# EAGLE board untitled (EAGLE 9.6.2), part 1 of 9
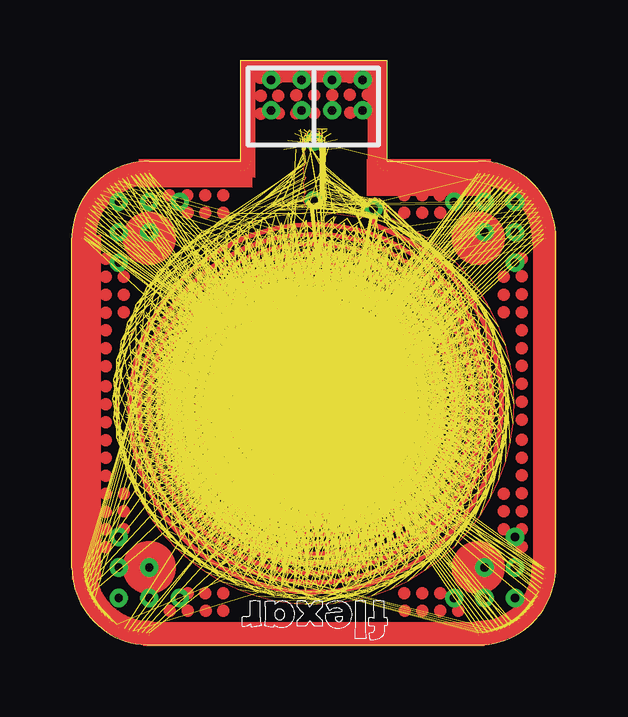
[diagram p0: board, top side]
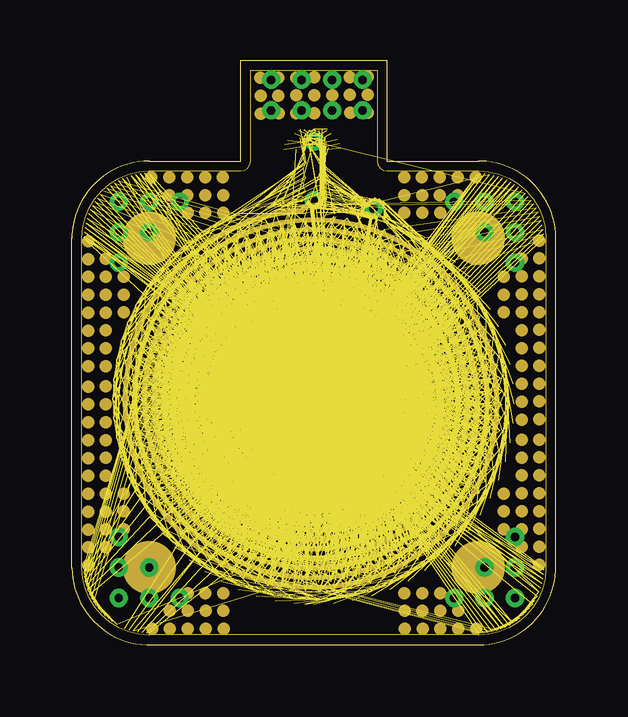
[diagram p1: board, inner layer Route2]
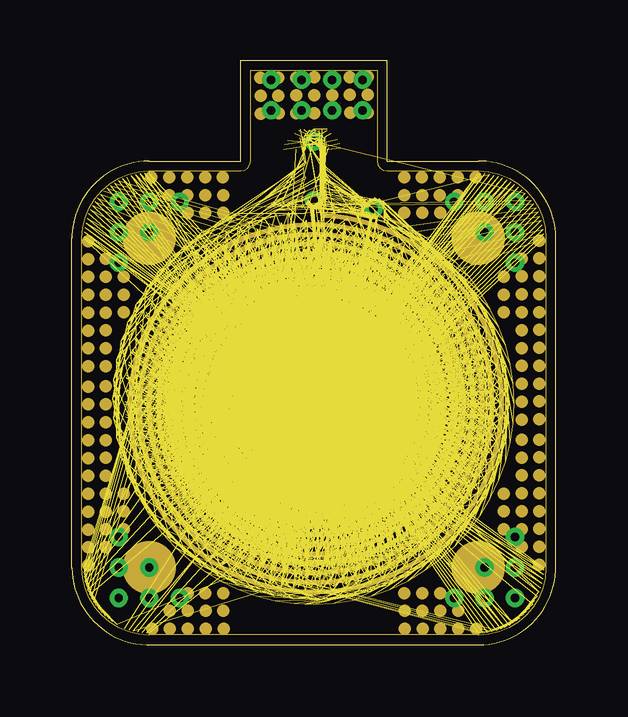
[diagram p2: board, inner layer Route3]
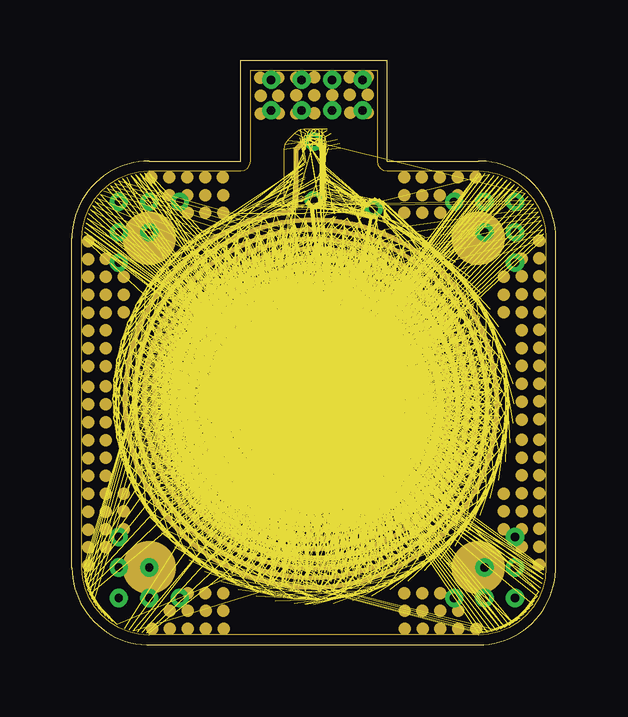
[diagram p3: board, inner layer Route14]
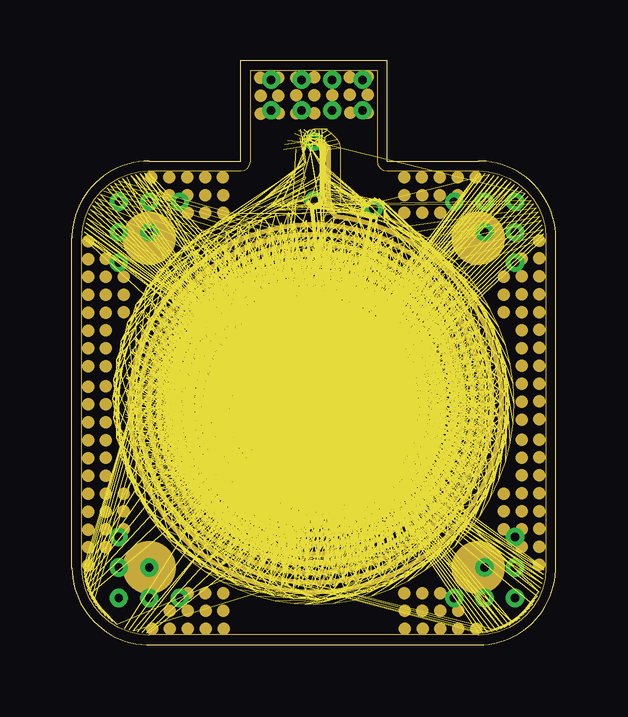
[diagram p4: board, inner layer Route15]
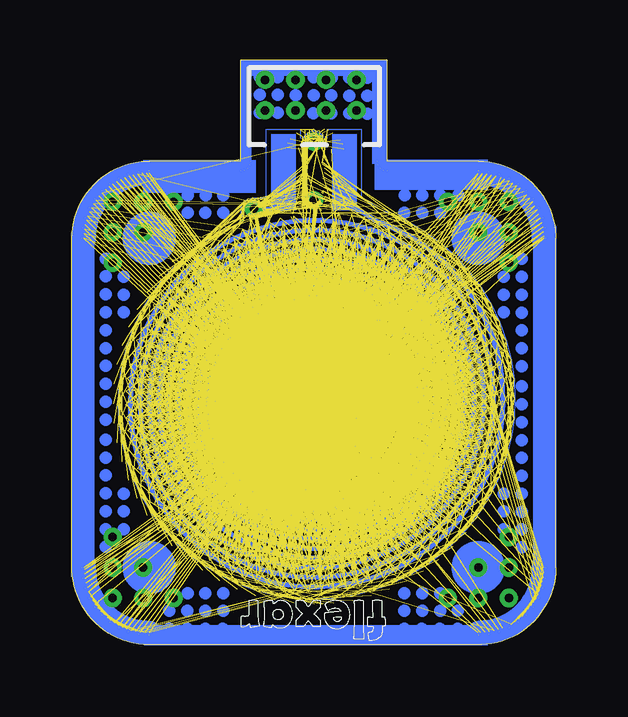
[diagram p5: board, bottom side, seen from below]

Size 20.16 x 24.36 mm. Coordinates in mm from the lower left corner, seen from the top.
Outline: 0,3.22 0.01,3 0.03,2.77 0.07,2.55 0.12,2.34 0.19,2.12 0.28,1.91 0.38,1.71 0.49,1.52 0.62,1.33 0.75,1.15 0.9,0.98 1.07,0.83 1.24,0.68 1.42,0.55 1.61,0.43 1.81,0.33 2.02,0.23 2.23,0.16 2.44,0.1 2.66,0.05 2.89,0.02 3.11,0 3.22,0 16.94,0 17.16,0.01 17.39,0.03 17.61,0.07 17.82,0.12 18.04,0.19 18.25,0.28 18.45,0.38 18.64,0.49 18.83,0.62 19.01,0.75 19.18,0.9 19.33,1.07 19.48,1.24 19.61,1.42 19.73,1.61 19.83,1.81 19.93,2.02 20,2.23 20.06,2.44 20.11,2.66 20.14,2.89 20.16,3.11 20.16,3.22 20.16,16.94 20.15,17.16 20.13,17.39 20.09,17.61 20.04,17.82 19.97,18.04 19.88,18.25 19.78,18.45 19.67,18.64 19.54,18.83 19.41,19.01 19.26,19.18 19.09,19.33 18.92,19.48 18.74,19.61 18.55,19.73 18.35,19.83 18.14,19.93 17.93,20 17.72,20.06 17.5,20.11 17.27,20.14 17.05,20.16 16.94,20.16 13.13,20.16 13.13,24.36 7.03,24.36 7.03,20.16 3.22,20.16 3,20.15 2.77,20.13 2.55,20.09 2.34,20.04 2.12,19.97 1.91,19.88 1.71,19.78 1.52,19.67 1.33,19.54 1.15,19.41 0.98,19.26 0.83,19.09 0.68,18.92 0.55,18.74 0.43,18.55 0.33,18.35 0.23,18.14 0.16,17.93 0.1,17.72 0.05,17.5 0.02,17.27 0,17.05 0,16.94 0,3.22
Copper layers (1+2*3+14*15+16): Top 0.035mm / dielectric 1.5mm / Route2 0.035mm / dielectric 0.15mm / Route3 0.035mm / dielectric 0.2mm / Route14 0.035mm / dielectric 0.15mm / Route15 0.035mm / dielectric 0.2mm / Bottom 0.035mm
Design rules "default *": minimum track width 6mil, minimum drill 0.35mm, track to track 6mil, track to pad 6mil, pad to pad 6mil, via to via 6mil, smd to smd 6mil, copper to edge 40mil, drill to drill 6mil, minimum pad ring 10mil, minimum via ring 8mil, stop-mask expansion 4mil, vias tented up to drill 0mil, thermal gap 10mil

## Placement (x,y rotation side)

## Tracks (layer width: path | path; a pad name or v marks a point on that pad's centre or on a via)
S$1  (5 unrouted)
  Top 0: 12.72,20.16 12.75,20
  Route2 0: 12.72,20.16 12.75,20
  Route3 0: 12.72,20.16 12.75,20
  Route14 0: 12.72,20.16 12.75,20
  Route15 0: 12.72,20.16 12.75,20
  Bottom 0: 12.72,20.16 12.75,20
S$2  (5 unrouted)
  Top 0: 12.75,20 12.84,19.87
  Route2 0: 12.75,20 12.84,19.87
  Route3 0: 12.75,20 12.84,19.87
  Route14 0: 12.75,20 12.84,19.87
  Route15 0: 12.75,20 12.84,19.87
  Bottom 0: 12.75,20 12.84,19.87
S$3  (5 unrouted)
  Top 0: 12.84,19.87 12.97,19.78
  Route2 0: 12.84,19.87 12.97,19.78
  Route3 0: 12.84,19.87 12.97,19.78
  Route14 0: 12.84,19.87 12.97,19.78
  Route15 0: 12.84,19.87 12.97,19.78
  Bottom 0: 12.84,19.87 12.97,19.78
S$4  (5 unrouted)
  Top 0: 12.97,19.78 13.13,19.75
  Route2 0: 12.97,19.78 13.13,19.75
  Route3 0: 12.97,19.78 13.13,19.75
  Route14 0: 12.97,19.78 13.13,19.75
  Route15 0: 12.97,19.78 13.13,19.75
  Bottom 0: 12.97,19.78 13.13,19.75
S$5  (5 unrouted)
  Top 0: 13.13,19.75 16.94,19.75
  Route2 0: 13.13,19.75 16.94,19.75
  Route3 0: 13.13,19.75 16.94,19.75
  Route14 0: 13.13,19.75 16.94,19.75
  Route15 0: 13.13,19.75 16.94,19.75
  Bottom 0: 13.13,19.75 16.94,19.75
S$6  (5 unrouted)
  Top 0: 16.94,19.75 16.95,19.75
  Route2 0: 16.94,19.75 16.95,19.75
  Route3 0: 16.94,19.75 16.95,19.75
  Route14 0: 16.94,19.75 16.95,19.75
  Route15 0: 16.94,19.75 16.95,19.75
  Bottom 0: 16.94,19.75 16.95,19.75
S$7  (5 unrouted)
  Top 0: 16.95,19.75 17.38,19.72
  Route2 0: 16.95,19.75 17.38,19.72
  Route3 0: 16.95,19.75 17.38,19.72
  Route14 0: 16.95,19.75 17.38,19.72
  Route15 0: 16.95,19.75 17.38,19.72
  Bottom 0: 16.95,19.75 17.38,19.72
S$8  (5 unrouted)
  Top 0: 17.38,19.72 17.81,19.61
  Route2 0: 17.38,19.72 17.81,19.61
  Route3 0: 17.38,19.72 17.81,19.61
  Route14 0: 17.38,19.72 17.81,19.61
  Route15 0: 17.38,19.72 17.81,19.61
  Bottom 0: 17.38,19.72 17.81,19.61
S$9  (5 unrouted)
  Top 0: 17.81,19.61 18.21,19.44
  Route2 0: 17.81,19.61 18.21,19.44
  Route3 0: 17.81,19.61 18.21,19.44
  Route14 0: 17.81,19.61 18.21,19.44
  Route15 0: 17.81,19.61 18.21,19.44
  Bottom 0: 17.81,19.61 18.21,19.44
S$10  (5 unrouted)
  Top 0: 18.21,19.44 18.59,19.21
  Route2 0: 18.21,19.44 18.59,19.21
  Route3 0: 18.21,19.44 18.59,19.21
  Route14 0: 18.21,19.44 18.59,19.21
  Route15 0: 18.21,19.44 18.59,19.21
  Bottom 0: 18.21,19.44 18.59,19.21
S$11  (5 unrouted)
  Top 0: 18.59,19.21 18.93,18.93
  Route2 0: 18.59,19.21 18.93,18.93
  Route3 0: 18.59,19.21 18.93,18.93
  Route14 0: 18.59,19.21 18.93,18.93
  Route15 0: 18.59,19.21 18.93,18.93
  Bottom 0: 18.59,19.21 18.93,18.93
S$12  (5 unrouted)
  Top 0: 18.93,18.93 19.21,18.59
  Route2 0: 18.93,18.93 19.21,18.59
  Route3 0: 18.93,18.93 19.21,18.59
  Route14 0: 18.93,18.93 19.21,18.59
  Route15 0: 18.93,18.93 19.21,18.59
  Bottom 0: 18.93,18.93 19.21,18.59
S$13  (5 unrouted)
  Top 0: 19.21,18.59 19.44,18.21
  Route2 0: 19.21,18.59 19.44,18.21
  Route3 0: 19.21,18.59 19.44,18.21
  Route14 0: 19.21,18.59 19.44,18.21
  Route15 0: 19.21,18.59 19.44,18.21
  Bottom 0: 19.21,18.59 19.44,18.21
S$14  (5 unrouted)
  Top 0: 19.44,18.21 19.61,17.81
  Route2 0: 19.44,18.21 19.61,17.81
  Route3 0: 19.44,18.21 19.61,17.81
  Route14 0: 19.44,18.21 19.61,17.81
  Route15 0: 19.44,18.21 19.61,17.81
  Bottom 0: 19.44,18.21 19.61,17.81
S$15  (5 unrouted)
  Top 0: 19.61,17.81 19.72,17.38
  Route2 0: 19.61,17.81 19.72,17.38
  Route3 0: 19.61,17.81 19.72,17.38
  Route14 0: 19.61,17.81 19.72,17.38
  Route15 0: 19.61,17.81 19.72,17.38
  Bottom 0: 19.61,17.81 19.72,17.38
S$16  (5 unrouted)
  Top 0: 19.72,17.38 19.75,16.95
  Route2 0: 19.72,17.38 19.75,16.95
  Route3 0: 19.72,17.38 19.75,16.95
  Route14 0: 19.72,17.38 19.75,16.95
  Route15 0: 19.72,17.38 19.75,16.95
  Bottom 0: 19.72,17.38 19.75,16.95
S$17  (5 unrouted)
  Top 0: 19.75,16.95 19.75,16.94
  Route2 0: 19.75,16.95 19.75,16.94
  Route3 0: 19.75,16.95 19.75,16.94
  Route14 0: 19.75,16.95 19.75,16.94
  Route15 0: 19.75,16.95 19.75,16.94
  Bottom 0: 19.75,16.95 19.75,16.94
S$18  (5 unrouted)
  Top 0: 19.75,16.94 19.75,3.22
  Route2 0: 19.75,16.94 19.75,3.22
  Route3 0: 19.75,16.94 19.75,3.22
  Route14 0: 19.75,16.94 19.75,3.22
  Route15 0: 19.75,16.94 19.75,3.22
  Bottom 0: 19.75,16.94 19.75,3.22
S$19  (5 unrouted)
  Top 0: 19.75,3.22 19.75,3.21
  Route2 0: 19.75,3.22 19.75,3.21
  Route3 0: 19.75,3.22 19.75,3.21
  Route14 0: 19.75,3.22 19.75,3.21
  Route15 0: 19.75,3.22 19.75,3.21
  Bottom 0: 19.75,3.22 19.75,3.21
S$20  (5 unrouted)
  Top 0: 19.75,3.21 19.72,2.78
  Route2 0: 19.75,3.21 19.72,2.78
  Route3 0: 19.75,3.21 19.72,2.78
  Route14 0: 19.75,3.21 19.72,2.78
  Route15 0: 19.75,3.21 19.72,2.78
  Bottom 0: 19.75,3.21 19.72,2.78
S$21  (5 unrouted)
  Top 0: 19.72,2.78 19.61,2.35
  Route2 0: 19.72,2.78 19.61,2.35
  Route3 0: 19.72,2.78 19.61,2.35
  Route14 0: 19.72,2.78 19.61,2.35
  Route15 0: 19.72,2.78 19.61,2.35
  Bottom 0: 19.72,2.78 19.61,2.35
S$22  (5 unrouted)
  Top 0: 19.61,2.35 19.44,1.95
  Route2 0: 19.61,2.35 19.44,1.95
  Route3 0: 19.61,2.35 19.44,1.95
  Route14 0: 19.61,2.35 19.44,1.95
  Route15 0: 19.61,2.35 19.44,1.95
  Bottom 0: 19.61,2.35 19.44,1.95
S$23  (5 unrouted)
  Top 0: 19.44,1.95 19.21,1.57
  Route2 0: 19.44,1.95 19.21,1.57
  Route3 0: 19.44,1.95 19.21,1.57
  Route14 0: 19.44,1.95 19.21,1.57
  Route15 0: 19.44,1.95 19.21,1.57
  Bottom 0: 19.44,1.95 19.21,1.57
S$24  (5 unrouted)
  Top 0: 19.21,1.57 18.93,1.23
  Route2 0: 19.21,1.57 18.93,1.23
  Route3 0: 19.21,1.57 18.93,1.23
  Route14 0: 19.21,1.57 18.93,1.23
  Route15 0: 19.21,1.57 18.93,1.23
  Bottom 0: 19.21,1.57 18.93,1.23
S$25  (5 unrouted)
  Top 0: 18.93,1.23 18.59,0.95
  Route2 0: 18.93,1.23 18.59,0.95
  Route3 0: 18.93,1.23 18.59,0.95
  Route14 0: 18.93,1.23 18.59,0.95
  Route15 0: 18.93,1.23 18.59,0.95
  Bottom 0: 18.93,1.23 18.59,0.95
S$26  (5 unrouted)
  Top 0: 18.59,0.95 18.21,0.72
  Route2 0: 18.59,0.95 18.21,0.72
  Route3 0: 18.59,0.95 18.21,0.72
  Route14 0: 18.59,0.95 18.21,0.72
  Route15 0: 18.59,0.95 18.21,0.72
  Bottom 0: 18.59,0.95 18.21,0.72
S$27  (5 unrouted)
  Top 0: 18.21,0.72 17.81,0.55
  Route2 0: 18.21,0.72 17.81,0.55
  Route3 0: 18.21,0.72 17.81,0.55
  Route14 0: 18.21,0.72 17.81,0.55
  Route15 0: 18.21,0.72 17.81,0.55
  Bottom 0: 18.21,0.72 17.81,0.55
S$28  (5 unrouted)
  Top 0: 17.81,0.55 17.38,0.44
  Route2 0: 17.81,0.55 17.38,0.44
  Route3 0: 17.81,0.55 17.38,0.44
  Route14 0: 17.81,0.55 17.38,0.44
  Route15 0: 17.81,0.55 17.38,0.44
  Bottom 0: 17.81,0.55 17.38,0.44
S$29  (5 unrouted)
  Top 0: 17.38,0.44 16.95,0.41
  Route2 0: 17.38,0.44 16.95,0.41
  Route3 0: 17.38,0.44 16.95,0.41
  Route14 0: 17.38,0.44 16.95,0.41
  Route15 0: 17.38,0.44 16.95,0.41
  Bottom 0: 17.38,0.44 16.95,0.41
S$30  (5 unrouted)
  Top 0: 16.95,0.41 16.94,0.41
  Route2 0: 16.95,0.41 16.94,0.41
  Route3 0: 16.95,0.41 16.94,0.41
  Route14 0: 16.95,0.41 16.94,0.41
  Route15 0: 16.95,0.41 16.94,0.41
  Bottom 0: 16.95,0.41 16.94,0.41
S$31  (5 unrouted)
  Top 0: 16.94,0.41 3.22,0.41
  Route2 0: 16.94,0.41 3.22,0.41
  Route3 0: 16.94,0.41 3.22,0.41
  Route14 0: 16.94,0.41 3.22,0.41
  Route15 0: 16.94,0.41 3.22,0.41
  Bottom 0: 16.94,0.41 3.22,0.41
S$32  (5 unrouted)
  Top 0: 3.22,0.41 3.21,0.41
  Route2 0: 3.22,0.41 3.21,0.41
  Route3 0: 3.22,0.41 3.21,0.41
  Route14 0: 3.22,0.41 3.21,0.41
  Route15 0: 3.22,0.41 3.21,0.41
  Bottom 0: 3.22,0.41 3.21,0.41
S$33  (5 unrouted)
  Top 0: 3.21,0.41 2.78,0.44
  Route2 0: 3.21,0.41 2.78,0.44
  Route3 0: 3.21,0.41 2.78,0.44
  Route14 0: 3.21,0.41 2.78,0.44
  Route15 0: 3.21,0.41 2.78,0.44
  Bottom 0: 3.21,0.41 2.78,0.44
S$34  (5 unrouted)
  Top 0: 2.78,0.44 2.35,0.55
  Route2 0: 2.78,0.44 2.35,0.55
  Route3 0: 2.78,0.44 2.35,0.55
  Route14 0: 2.78,0.44 2.35,0.55
  Route15 0: 2.78,0.44 2.35,0.55
  Bottom 0: 2.78,0.44 2.35,0.55
S$35  (5 unrouted)
  Top 0: 2.35,0.55 1.95,0.72
  Route2 0: 2.35,0.55 1.95,0.72
  Route3 0: 2.35,0.55 1.95,0.72
  Route14 0: 2.35,0.55 1.95,0.72
  Route15 0: 2.35,0.55 1.95,0.72
  Bottom 0: 2.35,0.55 1.95,0.72
S$36  (5 unrouted)
  Top 0: 1.95,0.72 1.57,0.95
  Route2 0: 1.95,0.72 1.57,0.95
  Route3 0: 1.95,0.72 1.57,0.95
  Route14 0: 1.95,0.72 1.57,0.95
  Route15 0: 1.95,0.72 1.57,0.95
  Bottom 0: 1.95,0.72 1.57,0.95
S$37  (5 unrouted)
  Top 0: 1.57,0.95 1.23,1.23
  Route2 0: 1.57,0.95 1.23,1.23
  Route3 0: 1.57,0.95 1.23,1.23
  Route14 0: 1.57,0.95 1.23,1.23
  Route15 0: 1.57,0.95 1.23,1.23
  Bottom 0: 1.57,0.95 1.23,1.23
S$38  (5 unrouted)
  Top 0: 1.23,1.23 0.95,1.57
  Route2 0: 1.23,1.23 0.95,1.57
  Route3 0: 1.23,1.23 0.95,1.57
  Route14 0: 1.23,1.23 0.95,1.57
  Route15 0: 1.23,1.23 0.95,1.57
  Bottom 0: 1.23,1.23 0.95,1.57
S$39  (5 unrouted)
  Top 0: 0.95,1.57 0.72,1.95
  Route2 0: 0.95,1.57 0.72,1.95
  Route3 0: 0.95,1.57 0.72,1.95
  Route14 0: 0.95,1.57 0.72,1.95
  Route15 0: 0.95,1.57 0.72,1.95
  Bottom 0: 0.95,1.57 0.72,1.95
S$40  (5 unrouted)
  Top 0: 0.72,1.95 0.55,2.35
  Route2 0: 0.72,1.95 0.55,2.35
  Route3 0: 0.72,1.95 0.55,2.35
  Route14 0: 0.72,1.95 0.55,2.35
  Route15 0: 0.72,1.95 0.55,2.35
  Bottom 0: 0.72,1.95 0.55,2.35
S$41  (5 unrouted)
  Top 0: 0.55,2.35 0.44,2.78
  Route2 0: 0.55,2.35 0.44,2.78
  Route3 0: 0.55,2.35 0.44,2.78
  Route14 0: 0.55,2.35 0.44,2.78
  Route15 0: 0.55,2.35 0.44,2.78
  Bottom 0: 0.55,2.35 0.44,2.78
S$42  (5 unrouted)
  Top 0: 0.44,2.78 0.41,3.21
  Route2 0: 0.44,2.78 0.41,3.21
  Route3 0: 0.44,2.78 0.41,3.21
  Route14 0: 0.44,2.78 0.41,3.21
  Route15 0: 0.44,2.78 0.41,3.21
  Bottom 0: 0.44,2.78 0.41,3.21
S$43  (5 unrouted)
  Top 0: 0.41,3.21 0.41,3.22
  Route2 0: 0.41,3.21 0.41,3.22
  Route3 0: 0.41,3.21 0.41,3.22
  Route14 0: 0.41,3.21 0.41,3.22
  Route15 0: 0.41,3.21 0.41,3.22
  Bottom 0: 0.41,3.21 0.41,3.22
S$44  (5 unrouted)
  Top 0: 0.41,3.22 0.41,16.94
  Route2 0: 0.41,3.22 0.41,16.94
  Route3 0: 0.41,3.22 0.41,16.94
  Route14 0: 0.41,3.22 0.41,16.94
  Route15 0: 0.41,3.22 0.41,16.94
  Bottom 0: 0.41,3.22 0.41,16.94
S$45  (5 unrouted)
  Top 0: 0.41,16.94 0.41,16.95
  Route2 0: 0.41,16.94 0.41,16.95
  Route3 0: 0.41,16.94 0.41,16.95
  Route14 0: 0.41,16.94 0.41,16.95
  Route15 0: 0.41,16.94 0.41,16.95
  Bottom 0: 0.41,16.94 0.41,16.95
S$46  (5 unrouted)
  Top 0: 0.41,16.95 0.44,17.38
  Route2 0: 0.41,16.95 0.44,17.38
  Route3 0: 0.41,16.95 0.44,17.38
  Route14 0: 0.41,16.95 0.44,17.38
  Route15 0: 0.41,16.95 0.44,17.38
  Bottom 0: 0.41,16.95 0.44,17.38
S$47  (5 unrouted)
  Top 0: 0.44,17.38 0.55,17.81
  Route2 0: 0.44,17.38 0.55,17.81
  Route3 0: 0.44,17.38 0.55,17.81
  Route14 0: 0.44,17.38 0.55,17.81
  Route15 0: 0.44,17.38 0.55,17.81
  Bottom 0: 0.44,17.38 0.55,17.81
S$48  (5 unrouted)
  Top 0: 0.55,17.81 0.72,18.21
  Route2 0: 0.55,17.81 0.72,18.21
  Route3 0: 0.55,17.81 0.72,18.21
  Route14 0: 0.55,17.81 0.72,18.21
  Route15 0: 0.55,17.81 0.72,18.21
  Bottom 0: 0.55,17.81 0.72,18.21
S$49  (5 unrouted)
  Top 0: 0.72,18.21 0.95,18.59
  Route2 0: 0.72,18.21 0.95,18.59
  Route3 0: 0.72,18.21 0.95,18.59
  Route14 0: 0.72,18.21 0.95,18.59
  Route15 0: 0.72,18.21 0.95,18.59
  Bottom 0: 0.72,18.21 0.95,18.59
S$50  (5 unrouted)
  Top 0: 0.95,18.59 1.23,18.93
  Route2 0: 0.95,18.59 1.23,18.93
  Route3 0: 0.95,18.59 1.23,18.93
  Route14 0: 0.95,18.59 1.23,18.93
  Route15 0: 0.95,18.59 1.23,18.93
  Bottom 0: 0.95,18.59 1.23,18.93
S$51  (5 unrouted)
  Top 0: 1.23,18.93 1.57,19.21
  Route2 0: 1.23,18.93 1.57,19.21
  Route3 0: 1.23,18.93 1.57,19.21
  Route14 0: 1.23,18.93 1.57,19.21
  Route15 0: 1.23,18.93 1.57,19.21
  Bottom 0: 1.23,18.93 1.57,19.21
S$52  (5 unrouted)
  Top 0: 1.57,19.21 1.95,19.44
  Route2 0: 1.57,19.21 1.95,19.44
  Route3 0: 1.57,19.21 1.95,19.44
  Route14 0: 1.57,19.21 1.95,19.44
  Route15 0: 1.57,19.21 1.95,19.44
  Bottom 0: 1.57,19.21 1.95,19.44
S$53  (5 unrouted)
  Top 0: 1.95,19.44 2.35,19.61
  Route2 0: 1.95,19.44 2.35,19.61
  Route3 0: 1.95,19.44 2.35,19.61
  Route14 0: 1.95,19.44 2.35,19.61
  Route15 0: 1.95,19.44 2.35,19.61
  Bottom 0: 1.95,19.44 2.35,19.61
S$54  (5 unrouted)
  Top 0: 2.35,19.61 2.78,19.72
  Route2 0: 2.35,19.61 2.78,19.72
  Route3 0: 2.35,19.61 2.78,19.72
  Route14 0: 2.35,19.61 2.78,19.72
  Route15 0: 2.35,19.61 2.78,19.72
  Bottom 0: 2.35,19.61 2.78,19.72
S$55  (5 unrouted)
  Top 0: 2.78,19.72 3.21,19.75
  Route2 0: 2.78,19.72 3.21,19.75
  Route3 0: 2.78,19.72 3.21,19.75
  Route14 0: 2.78,19.72 3.21,19.75
  Route15 0: 2.78,19.72 3.21,19.75
  Bottom 0: 2.78,19.72 3.21,19.75
S$56  (5 unrouted)
  Top 0: 3.21,19.75 3.22,19.75
  Route2 0: 3.21,19.75 3.22,19.75
  Route3 0: 3.21,19.75 3.22,19.75
  Route14 0: 3.21,19.75 3.22,19.75
  Route15 0: 3.21,19.75 3.22,19.75
  Bottom 0: 3.21,19.75 3.22,19.75
S$57  (5 unrouted)
  Top 0: 3.22,19.75 7.03,19.75
  Route2 0: 3.22,19.75 7.03,19.75
  Route3 0: 3.22,19.75 7.03,19.75
  Route14 0: 3.22,19.75 7.03,19.75
  Route15 0: 3.22,19.75 7.03,19.75
  Bottom 0: 3.22,19.75 7.03,19.75
S$58  (5 unrouted)
  Top 0: 7.03,19.75 7.19,19.78
  Route2 0: 7.03,19.75 7.19,19.78
  Route3 0: 7.03,19.75 7.19,19.78
  Route14 0: 7.03,19.75 7.19,19.78
  Route15 0: 7.03,19.75 7.19,19.78
  Bottom 0: 7.03,19.75 7.19,19.78
S$59  (5 unrouted)
  Top 0: 7.19,19.78 7.32,19.87
  Route2 0: 7.19,19.78 7.32,19.87
  Route3 0: 7.19,19.78 7.32,19.87
  Route14 0: 7.19,19.78 7.32,19.87
  Route15 0: 7.19,19.78 7.32,19.87
  Bottom 0: 7.19,19.78 7.32,19.87
S$60  (5 unrouted)
  Top 0: 7.32,19.87 7.41,20
  Route2 0: 7.32,19.87 7.41,20
  Route3 0: 7.32,19.87 7.41,20
  Route14 0: 7.32,19.87 7.41,20
  Route15 0: 7.32,19.87 7.41,20
  Bottom 0: 7.32,19.87 7.41,20
S$61  (5 unrouted)
  Top 0: 7.41,20 7.44,20.16
  Route2 0: 7.41,20 7.44,20.16
  Route3 0: 7.41,20 7.44,20.16
  Route14 0: 7.41,20 7.44,20.16
  Route15 0: 7.41,20 7.44,20.16
  Bottom 0: 7.41,20 7.44,20.16
S$62  (5 unrouted)
  Top 0: 7.44,20.16 7.44,23.95
  Route2 0: 7.44,20.16 7.44,23.95
  Route3 0: 7.44,20.16 7.44,23.95
  Route14 0: 7.44,20.16 7.44,23.95
  Route15 0: 7.44,20.16 7.44,23.95
  Bottom 0: 7.44,20.16 7.44,23.95
S$63  (5 unrouted)
  Top 0: 7.44,23.95 12.72,23.95
  Route2 0: 7.44,23.95 12.72,23.95
  Route3 0: 7.44,23.95 12.72,23.95
  Route14 0: 7.44,23.95 12.72,23.95
  Route15 0: 7.44,23.95 12.72,23.95
  Bottom 0: 7.44,23.95 12.72,23.95
S$64  (5 unrouted)
  Top 0: 12.72,23.95 12.72,20.16
  Route2 0: 12.72,23.95 12.72,20.16
  Route3 0: 12.72,23.95 12.72,20.16
  Route14 0: 12.72,23.95 12.72,20.16
  Route15 0: 12.72,23.95 12.72,20.16
  Bottom 0: 12.72,23.95 12.72,20.16
S$65  (5 unrouted)
  Top 0: 10.17,21.42 9.99,21.42
  Route2 0: 10.17,21.42 9.99,21.42
  Route3 0: 10.17,21.42 9.99,21.42
  Route14 0: 10.08,21.48 9.65,21.48
  Route15 0: 10.44,21.48 10.08,21.48
  Bottom 0: 12.06,21.48 10.64,21.48
S$66  (5 unrouted)
  Top 0: 9.99,21.42 9.82,21.35
  Route2 0: 9.99,21.42 9.82,21.35
  Route3 0: 9.99,21.42 9.82,21.35
  Route14 0: 9.65,21.48 9.46,21.44
  Route15 0: 10.08,21.48 9.88,21.44
  Bottom 0: 10.64,21.48 10.64,21.12
S$67  (5 unrouted)
  Top 0: 9.82,21.35 9.7,21.22
  Route2 0: 9.82,21.35 9.7,21.22
  Route3 0: 9.82,21.35 9.7,21.22
  Route14 0: 9.46,21.44 9.29,21.33
  Route15 0: 9.88,21.44 9.72,21.33
  Bottom 0: 10.64,21.12 10.51,21.1
S$68  (5 unrouted)
  Top 0: 9.7,21.22 9.63,21.06
  Route2 0: 9.7,21.22 9.63,21.06
  Route3 0: 9.7,21.22 9.63,21.06
  Route14 0: 9.29,21.33 8.98,21.02
  Route15 0: 9.72,21.33 9.61,21.16
  Bottom 0: 10.51,21.1 10.46,21.22
S$69  (5 unrouted)
  Top 0: 9.63,21.06 9.63,20.88
  Route2 0: 9.63,21.06 9.63,20.88
  Route3 0: 9.63,21.06 9.63,20.88
  Route14 0: 8.98,21.02 8.87,20.85
  Route15 0: 9.61,21.16 9.57,20.97
  Bottom 0: 10.46,21.22 10.33,21.35
S$70  (5 unrouted)
  Top 0: 9.63,20.88 9.7,20.71
  Route2 0: 9.63,20.88 9.7,20.71
  Route3 0: 9.63,20.88 9.7,20.71
  Route14 0: 8.87,20.85 8.83,20.66
  Route15 0: 9.57,20.97 9.61,20.77
  Bottom 0: 10.33,21.35 10.17,21.42
S$71  (5 unrouted)
  Top 0: 9.7,20.71 9.74,20.67
  Route2 0: 9.7,20.71 9.74,20.67
  Route3 0: 9.7,20.71 9.74,20.67
  Route14 0: 8.83,20.66 8.83,18.55
  Route15 0: 9.61,20.77 9.7,20.63
  Bottom 0: 10.17,21.42 9.99,21.42
S$72  (5 unrouted)
  Top 0: 9.74,20.67 9.7,20.62
  Route2 0: 9.74,20.67 9.7,20.62
  Route3 0: 9.74,20.67 9.7,20.62
  Route14 0: 8.83,18.55 8.79,18.5
  Route15 0: 9.7,20.63 9.7,20.62
  Bottom 0: 9.99,21.42 9.82,21.35
S$73  (5 unrouted)
  Top 0: 9.7,20.62 9.63,20.46
  Route2 0: 9.7,20.62 9.63,20.46
  Route3 0: 9.7,20.62 9.63,20.46
  Route14 0: 8.79,18.5 8.43,18.45
  Route15 0: 9.7,20.62 9.63,20.46
  Bottom 0: 9.82,21.35 9.7,21.22
S$74  (5 unrouted)
  Top 0: 9.63,20.46 9.63,20.28
  Route2 0: 9.63,20.46 9.63,20.28
  Route3 0: 9.63,20.46 9.63,20.28
  Route14 0: 8.43,18.45 7.63,18.25
  Route15 0: 9.63,20.46 9.63,20.28
  Bottom 0: 9.7,21.22 9.65,21.1
S$75  (5 unrouted)
  Top 0: 9.63,20.28 9.7,20.11
  Route2 0: 9.63,20.28 9.7,20.11
  Route3 0: 9.63,20.28 9.7,20.11
  Route14 0: 7.63,18.25 6.86,17.97
  Route15 0: 9.63,20.28 9.7,20.11
  Bottom 0: 9.65,21.1 9.52,21.12
S$76  (5 unrouted)
  Top 0: 9.7,20.11 9.74,20.07
  Route2 0: 9.7,20.11 9.74,20.07
  Route3 0: 9.7,20.11 9.74,20.07
  Route14 0: 6.86,17.97 6.12,17.62
  Route15 0: 9.7,20.11 9.74,20.07
  Bottom 0: 9.52,21.12 9.52,21.48
S$77  (5 unrouted)
  Top 0: 9.74,20.07 9.7,20.02
  Route2 0: 9.74,20.07 9.7,20.02
  Route3 0: 9.74,20.07 9.7,20.02
  Route14 0: 6.12,17.62 5.41,17.2
  Route15 0: 9.74,20.07 9.7,20.02
  Bottom 0: 9.52,21.48 8.1,21.48
S$78  (5 unrouted)
  Top 0: 9.7,20.02 9.63,19.86
  Route2 0: 9.7,20.02 9.63,19.86
  Route3 0: 9.7,20.02 9.63,19.86
  Route14 0: 5.41,17.2 4.76,16.71
  Route15 0: 9.7,20.02 9.63,19.86
  Bottom 0: 8.1,21.48 8.1,18.64
S$79  (5 unrouted)
  Top 0: 9.63,19.86 9.63,19.68
  Route2 0: 9.63,19.86 9.63,19.68
  Route3 0: 9.63,19.86 9.63,19.68
  Route14 0: 4.76,16.71 4.15,16.16
  Route15 0: 9.63,19.86 9.63,19.68
  Bottom 0: 8.1,18.64 7.28,18.13
S$80  (5 unrouted)
  Top 0: 9.63,19.68 9.7,19.51
  Route2 0: 9.63,19.68 9.7,19.51
  Route3 0: 9.63,19.68 9.7,19.51
  Route14 0: 4.15,16.16 3.6,15.55
  Route15 0: 9.63,19.68 9.7,19.51
  Bottom 0: 7.28,18.13 6.86,17.97
S$81  (5 unrouted)
  Top 0: 9.7,19.51 9.74,19.47
  Route2 0: 9.7,19.51 9.74,19.47
  Route3 0: 9.7,19.51 9.74,19.47
  Route14 0: 3.6,15.55 3.11,14.9
  Route15 0: 9.7,19.51 9.74,19.47
  Bottom 0: 6.86,17.97 6.12,17.62
S$82  (5 unrouted)
  Top 0: 9.74,19.47 9.7,19.42
  Route2 0: 9.74,19.47 9.7,19.42
  Route3 0: 9.74,19.47 9.7,19.42
  Route14 0: 3.11,14.9 2.69,14.19
  Route15 0: 9.74,19.47 9.7,19.42
  Bottom 0: 6.12,17.62 5.41,17.2
S$83  (5 unrouted)
  Top 0: 9.7,19.42 9.63,19.26
  Route2 0: 9.7,19.42 9.63,19.26
  Route3 0: 9.7,19.42 9.63,19.26
  Route14 0: 2.69,14.19 2.34,13.45
  Route15 0: 9.7,19.42 9.63,19.26
  Bottom 0: 5.41,17.2 4.76,16.71
S$84  (5 unrouted)
  Top 0: 9.63,19.26 9.63,19.08
  Route2 0: 9.63,19.26 9.63,19.08
  Route3 0: 9.63,19.26 9.63,19.08
  Route14 0: 2.34,13.45 2.06,12.68
  Route15 0: 9.63,19.26 9.63,19.08
  Bottom 0: 4.76,16.71 4.15,16.16
S$85  (5 unrouted)
  Top 0: 9.63,19.08 9.7,18.91
  Route2 0: 9.63,19.08 9.7,18.91
  Route3 0: 9.63,19.08 9.7,18.91
  Route14 0: 2.06,12.68 1.86,11.88
  Route15 0: 9.63,19.08 9.7,18.91
  Bottom 0: 4.15,16.16 3.6,15.55
S$86  (4 unrouted)
  Route2 0: 9.7,18.91
  Route3 0: 9.7,18.91 9.7,18.9
  Route14 0: 1.86,11.88 1.74,11.07
  Route15 0: 9.7,18.91 9.74,18.87
  Bottom 0: 3.6,15.55 3.11,14.9
S$87  (4 unrouted)
  Route2 0: 9.7,18.91 9.34,18.58
  Route3 0: 9.7,18.9 9.67,18.87
  Route14 0: 1.74,11.07 1.7,10.25
  Route15 0: 9.74,18.87 9.7,18.82
  Bottom 0: 3.11,14.9 2.69,14.19
S$88  (4 unrouted)
  Route2 0: 9.34,18.58 9.24,18.57
  Route3 0: 9.67,18.87 9.58,18.69
  Route14 0: 1.7,10.25 1.74,9.43
  Route15 0: 9.7,18.82 9.63,18.66
  Bottom 0: 2.69,14.19 2.34,13.45
S$89  (4 unrouted)
  Route2 0: 9.24,18.57 8.43,18.45
  Route3 0: 9.58,18.69 9.58,18.49
  Route14 0: 1.74,9.43 1.86,8.62
  Route15 0: 9.63,18.66 9.63,18.48
  Bottom 0: 2.34,13.45 2.06,12.68
S$90  (4 unrouted)
  Route2 0: 8.43,18.45 7.63,18.25
  Route3 0: 9.58,18.49 9.64,18.3
  Route14 0: 1.86,8.62 2.06,7.82
  Route15 0: 9.63,18.48 9.7,18.31
  Bottom 0: 2.06,12.68 1.86,11.88
S$91  (4 unrouted)
  Route2 0: 7.63,18.25 6.86,17.97
  Route3 0: 9.64,18.3 9.76,18.11
  Route14 0: 2.06,7.82 2.34,7.05
  Route15 0: 9.7,18.31 9.82,18.19
  Bottom 0: 1.86,11.88 1.74,11.07
S$92  (4 unrouted)
  Route2 0: 6.86,17.97 6.12,17.62
  Route3 0: 9.76,18.11 9.7,17.99
  Route14 0: 2.34,7.05 2.69,6.31
  Route15 0: 9.82,18.19 9.95,18.13
  Bottom 0: 1.74,11.07 1.7,10.25
S$93  (4 unrouted)
  Route2 0: 6.12,17.62 5.41,17.2
  Route3 0: 9.7,17.99 9.26,17.97
  Route14 0: 2.69,6.31 3.11,5.61
  Route15 0: 9.95,18.13 9.93,18
  Bottom 0: 1.7,10.25 1.74,9.43
S$94  (4 unrouted)
  Route2 0: 5.41,17.2 4.76,16.71
  Route3 0: 9.26,17.97 8.47,17.85
  Route14 0: 3.11,5.61 3.6,4.95
  Route15 0: 9.93,18 9.26,17.97
  Bottom 0: 1.74,9.43 1.86,8.62
S$95  (4 unrouted)
  Route2 0: 4.76,16.71 4.15,16.16
  Route3 0: 8.47,17.85 7.69,17.66
  Route14 0: 3.6,4.95 4.15,4.34
  Route15 0: 9.26,17.97 8.47,17.85
  Bottom 0: 1.86,8.62 2.06,7.82
S$96  (4 unrouted)
  Route2 0: 4.15,16.16 3.6,15.55
  Route3 0: 7.69,17.66 6.94,17.39
  Route14 0: 4.15,4.34 4.76,3.79
  Route15 0: 8.47,17.85 7.69,17.66
  Bottom 0: 2.06,7.82 2.34,7.05
S$97  (4 unrouted)
  Route2 0: 3.6,15.55 3.11,14.9
  Route3 0: 6.94,17.39 6.21,17.05
  Route14 0: 4.76,3.79 5.41,3.3
  Route15 0: 7.69,17.66 6.94,17.39
  Bottom 0: 2.34,7.05 2.69,6.31
S$98  (4 unrouted)
  Route2 0: 3.11,14.9 2.69,14.19
  Route3 0: 6.21,17.05 5.53,16.64
  Route14 0: 5.41,3.3 6.12,2.88
  Route15 0: 6.94,17.39 6.21,17.05
  Bottom 0: 2.69,6.31 3.11,5.61
S$99  (4 unrouted)
  Route2 0: 2.69,14.19 2.34,13.45
  Route3 0: 5.53,16.64 4.88,16.16
  Route14 0: 6.12,2.88 6.86,2.53
  Route15 0: 6.21,17.05 5.53,16.64
  Bottom 0: 3.11,5.61 3.6,4.95
S$100  (4 unrouted)
  Route2 0: 2.34,13.45 2.06,12.68
  Route3 0: 4.88,16.16 4.29,15.62
  Route14 0: 6.86,2.53 7.63,2.25
  Route15 0: 5.53,16.64 4.88,16.16
  Bottom 0: 3.6,4.95 4.15,4.34
S$101  (4 unrouted)
  Route2 0: 2.06,12.68 1.86,11.88
  Route3 0: 4.29,15.62 3.75,15.03
  Route14 0: 7.63,2.25 8.43,2.05
  Route15 0: 4.88,16.16 4.29,15.62
  Bottom 0: 4.15,4.34 4.76,3.79
S$102  (4 unrouted)
  Route2 0: 1.86,11.88 1.74,11.07
  Route3 0: 3.75,15.03 3.27,14.38
  Route14 0: 8.43,2.05 9.24,1.93
  Route15 0: 4.29,15.62 3.75,15.03
  Bottom 0: 4.76,3.79 5.41,3.3
S$103  (4 unrouted)
  Route2 0: 1.74,11.07 1.7,10.25
  Route3 0: 3.27,14.38 2.86,13.7
  Route14 0: 9.24,1.93 10.06,1.89
  Route15 0: 3.75,15.03 3.27,14.38
  Bottom 0: 5.41,3.3 6.12,2.88
S$104  (4 unrouted)
  Route2 0: 1.7,10.25 1.74,9.43
  Route3 0: 2.86,13.7 2.52,12.97
  Route14 0: 10.06,1.89 10.34,1.9
  Route15 0: 3.27,14.38 2.86,13.7
  Bottom 0: 6.12,2.88 6.86,2.53
S$105  (4 unrouted)
  Route2 0: 1.74,9.43 1.86,8.62
  Route3 0: 2.52,12.97 2.25,12.22
  Route14 0: 10.34,1.9 10.37,1.9
  Route15 0: 2.86,13.7 2.52,12.97
  Bottom 0: 6.86,2.53 7.63,2.25
S$106  (4 unrouted)
  Route2 0: 1.86,8.62 2.06,7.82
  Route3 0: 2.25,12.22 2.06,11.44
  Route14 0: 10.37,1.9 10.39,1.9
  Route15 0: 2.52,12.97 2.25,12.22
  Bottom 0: 7.63,2.25 8.43,2.05
S$107  (4 unrouted)
  Route2 0: 2.06,7.82 2.34,7.05
  Route3 0: 2.06,11.44 1.94,10.65
  Route14 0: 10.39,1.9 10.43,1.91
  Route15 0: 2.25,12.22 2.06,11.44
  Bottom 0: 8.43,2.05 9.24,1.93
S$108  (4 unrouted)
  Route2 0: 2.34,7.05 2.69,6.31
  Route3 0: 1.94,10.65 1.9,9.85
  Route14 0: 10.43,1.91 10.87,1.93
  Route15 0: 2.06,11.44 1.94,10.65
  Bottom 0: 9.24,1.93 10.06,1.89
S$109  (4 unrouted)
  Route2 0: 2.69,6.31 3.11,5.61
  Route3 0: 1.9,9.85 1.94,9.05
  Route14 0: 10.87,1.93 11.66,2.05
  Route15 0: 1.94,10.65 1.9,9.85
  Bottom 0: 10.06,1.89 10.34,1.9
S$110  (4 unrouted)
  Route2 0: 3.11,5.61 3.6,4.95
  Route3 0: 1.94,9.05 2.06,8.26
  Route14 0: 11.66,2.05 12.44,2.24
  Route15 0: 1.9,9.85 1.94,9.05
  Bottom 0: 10.34,1.9 10.37,1.9
S$111  (4 unrouted)
  Route2 0: 3.6,4.95 4.15,4.34
  Route3 0: 2.06,8.26 2.25,7.48
  Route14 0: 12.44,2.24 13.19,2.51
  Route15 0: 1.94,9.05 2.06,8.26
  Bottom 0: 10.37,1.9 10.39,1.9
S$112  (4 unrouted)
  Route2 0: 4.15,4.34 4.76,3.79
  Route3 0: 2.25,7.48 2.52,6.73
  Route14 0: 13.19,2.51 13.91,2.85
  Route15 0: 2.06,8.26 2.25,7.48
  Bottom 0: 10.39,1.9 10.43,1.91
S$113  (4 unrouted)
  Route2 0: 4.76,3.79 5.41,3.3
  Route3 0: 2.52,6.73 2.86,6
  Route14 0: 13.91,2.85 14.6,3.27
  Route15 0: 2.25,7.48 2.52,6.73
  Bottom 0: 10.43,1.91 10.87,1.93
S$114  (4 unrouted)
  Route2 0: 5.41,3.3 6.12,2.88
  Route3 0: 2.86,6 3.27,5.32
  Route14 0: 14.6,3.27 15.24,3.74
  Route15 0: 2.52,6.73 2.86,6
  Bottom 0: 10.87,1.93 11.66,2.05
S$115  (4 unrouted)
  Route2 0: 6.12,2.88 6.86,2.53
  Route3 0: 3.27,5.32 3.75,4.67
  Route14 0: 15.24,3.74 15.84,4.28
  Route15 0: 2.86,6 3.27,5.32
  Bottom 0: 11.66,2.05 12.44,2.24
S$116  (4 unrouted)
  Route2 0: 6.86,2.53 7.63,2.25
  Route3 0: 3.75,4.67 4.29,4.08
  Route14 0: 15.84,4.28 16.37,4.87
  Route15 0: 3.27,5.32 3.75,4.67
  Bottom 0: 12.44,2.24 13.19,2.51
S$117  (4 unrouted)
  Route2 0: 7.63,2.25 8.43,2.05
  Route3 0: 4.29,4.08 4.88,3.54
  Route14 0: 16.37,4.87 16.85,5.52
  Route15 0: 3.75,4.67 4.29,4.08
  Bottom 0: 13.19,2.51 13.91,2.85
S$118  (4 unrouted)
  Route2 0: 8.43,2.05 9.24,1.93
  Route3 0: 4.88,3.54 5.53,3.07
  Route14 0: 16.85,5.52 17.26,6.2
  Route15 0: 4.29,4.08 4.88,3.54
  Bottom 0: 13.91,2.85 14.6,3.27
S$119  (4 unrouted)
  Route2 0: 9.24,1.93 10.06,1.89
  Route3 0: 5.53,3.07 6.21,2.65
  Route14 0: 17.26,6.2 17.61,6.93
  Route15 0: 4.88,3.54 5.53,3.07
  Bottom 0: 14.6,3.27 15.24,3.74
S$120  (4 unrouted)
  Route2 0: 10.06,1.89 10.34,1.9
  Route3 0: 6.21,2.65 6.94,2.31
  Route14 0: 17.61,6.93 17.88,7.68
  Route15 0: 5.53,3.07 6.21,2.65
  Bottom 0: 15.24,3.74 15.84,4.28
S$121  (4 unrouted)
  Route2 0: 10.34,1.9 10.37,1.9
  Route3 0: 6.94,2.31 7.69,2.04
  Route14 0: 17.88,7.68 18.07,8.46
  Route15 0: 6.21,2.65 6.94,2.31
  Bottom 0: 15.84,4.28 16.37,4.87
S$122  (4 unrouted)
  Route2 0: 10.37,1.9 10.39,1.9
  Route3 0: 7.69,2.04 8.47,1.85
  Route14 0: 18.07,8.46 18.19,9.25
  Route15 0: 6.94,2.31 7.69,2.04
  Bottom 0: 16.37,4.87 16.85,5.52
S$123  (4 unrouted)
  Route2 0: 10.39,1.9 10.43,1.91
  Route3 0: 8.47,1.85 9.26,1.73
  Route14 0: 18.19,9.25 18.23,10.05
  Route15 0: 7.69,2.04 8.47,1.85
  Bottom 0: 16.85,5.52 17.26,6.2
S$124  (4 unrouted)
  Route2 0: 10.43,1.91 10.87,1.93
  Route3 0: 9.26,1.73 9.69,1.71
  Route14 0: 18.23,10.05 18.19,10.85
  Route15 0: 8.47,1.85 9.26,1.73
  Bottom 0: 17.26,6.2 17.61,6.93
S$125  (4 unrouted)
  Route2 0: 10.87,1.93 11.66,2.05
  Route3 0: 9.69,1.71 9.73,1.7
  Route14 0: 18.19,10.85 18.07,11.64
  Route15 0: 9.26,1.73 9.69,1.71
  Bottom 0: 17.61,6.93 17.88,7.68
S$126  (4 unrouted)
  Route2 0: 11.66,2.05 12.44,2.24
  Route3 0: 9.73,1.7 9.75,1.7
  Route14 0: 18.07,11.64 17.88,12.42
  Route15 0: 9.69,1.71 9.73,1.7
  Bottom 0: 17.88,7.68 18.07,8.46
S$127  (4 unrouted)
  Route2 0: 12.44,2.24 13.19,2.51
  Route3 0: 9.75,1.7 9.79,1.7
  Route14 0: 17.88,12.42 17.61,13.17
  Route15 0: 9.73,1.7 9.75,1.7
  Bottom 0: 18.07,8.46 18.19,9.25
S$128  (4 unrouted)
  Route2 0: 13.19,2.51 13.91,2.85
  Route3 0: 9.79,1.7 10.07,1.69
  Route14 0: 17.61,13.17 17.26,13.9
  Route15 0: 9.75,1.7 9.79,1.7
  Bottom 0: 18.19,9.25 18.23,10.05
S$129  (4 unrouted)
  Route2 0: 13.91,2.85 14.6,3.27
  Route3 0: 10.07,1.69 10.89,1.73
  Route14 0: 17.26,13.9 16.85,14.58
  Route15 0: 9.79,1.7 10.07,1.69
  Bottom 0: 18.23,10.05 18.19,10.85
S$130  (4 unrouted)
  Route2 0: 14.6,3.27 15.24,3.74
  Route3 0: 10.89,1.73 11.7,1.85
  Route14 0: 16.85,14.58 16.37,15.23
  Route15 0: 10.07,1.69 10.89,1.73
  Bottom 0: 18.19,10.85 18.07,11.64
S$131  (4 unrouted)
  Route2 0: 15.24,3.74 15.84,4.28
  Route3 0: 11.7,1.85 12.49,2.05
  Route14 0: 16.37,15.23 15.84,15.82
  Route15 0: 10.89,1.73 11.7,1.85
  Bottom 0: 18.07,11.64 17.88,12.42
S$132  (4 unrouted)
  Route2 0: 15.84,4.28 16.37,4.87
  Route3 0: 12.49,2.05 13.27,2.33
  Route14 0: 15.84,15.82 15.24,16.36
  Route15 0: 11.7,1.85 12.49,2.05
  Bottom 0: 17.88,12.42 17.61,13.17
S$133  (4 unrouted)
  Route2 0: 16.37,4.87 16.85,5.52
  Route3 0: 13.27,2.33 14.01,2.68
  Route14 0: 15.24,16.36 14.6,16.84
  Route15 0: 12.49,2.05 13.27,2.33
  Bottom 0: 17.61,13.17 17.26,13.9
S$134  (4 unrouted)
  Route2 0: 16.85,5.52 17.26,6.2
  Route3 0: 14.01,2.68 14.71,3.1
  Route14 0: 14.6,16.84 13.91,17.25
  Route15 0: 13.27,2.33 14.01,2.68
  Bottom 0: 17.26,13.9 16.85,14.58
S$135  (4 unrouted)
  Route2 0: 17.26,6.2 17.61,6.93
  Route3 0: 14.71,3.1 15.37,3.59
  Route14 0: 13.91,17.25 13.19,17.59
  Route15 0: 14.01,2.68 14.71,3.1
  Bottom 0: 16.85,14.58 16.37,15.23
S$136  (4 unrouted)
  Route2 0: 17.61,6.93 17.88,7.68
  Route3 0: 15.37,3.59 15.98,4.14
  Route14 0: 13.19,17.59 12.98,17.67
  Route15 0: 14.71,3.1 15.37,3.59
  Bottom 0: 16.37,15.23 15.84,15.82
S$137  (4 unrouted)
  Route2 0: 17.88,7.68 18.07,8.46
  Route3 0: 15.98,4.14 16.53,4.75
  Route14 0: 12.98,17.67 12.94,17.81
  Route15 0: 15.37,3.59 15.98,4.14
  Bottom 0: 15.84,15.82 15.24,16.36
S$138  (4 unrouted)
  Route2 0: 18.07,8.46 18.19,9.25
  Route3 0: 16.53,4.75 17.02,5.41
  Route14 0: 12.94,17.81 13,17.87
  Route15 0: 15.98,4.14 16.53,4.75
  Bottom 0: 15.24,16.36 14.6,16.84
S$139  (4 unrouted)
  Route2 0: 18.19,9.25 18.23,10.05
  Route3 0: 17.02,5.41 17.44,6.11
  Route14 0: 13,17.87 13.07,18.03
  Route15 0: 16.53,4.75 17.02,5.41
  Bottom 0: 14.6,16.84 13.91,17.25
S$140  (4 unrouted)
  Route2 0: 18.23,10.05 18.19,10.85
  Route3 0: 17.44,6.11 17.79,6.85
  Route14 0: 13.07,18.03 13.07,18.21
  Route15 0: 17.02,5.41 17.44,6.11
  Bottom 0: 13.91,17.25 13.19,17.59
S$141  (4 unrouted)
  Route2 0: 18.19,10.85 18.07,11.64
  Route3 0: 17.79,6.85 18.07,7.62
  Route14 0: 13.07,18.21 13,18.38
  Route15 0: 17.44,6.11 17.79,6.85
  Bottom 0: 13.19,17.59 13.02,17.65
S$142  (4 unrouted)
  Route2 0: 18.07,11.64 17.88,12.42
  Route3 0: 18.07,7.62 18.27,8.42
  Route14 0: 13,18.38 12.87,18.51
  Route15 0: 17.79,6.85 18.07,7.62
  Bottom 0: 13.02,17.65 13,17.79
S$143  (4 unrouted)
  Route2 0: 17.88,12.42 17.61,13.17
  Route3 0: 18.27,8.42 18.39,9.23
  Route14 0: 12.87,18.51 12.71,18.57
  Route15 0: 18.07,7.62 18.27,8.42
  Bottom 0: 13,17.79 13.09,17.93
S$144  (4 unrouted)
  Route2 0: 17.61,13.17 17.26,13.9
  Route3 0: 18.39,9.23 18.43,10.05
  Route14 0: 12.71,18.57 12.53,18.57
  Route15 0: 18.27,8.42 18.39,9.23
  Bottom 0: 13.09,17.93 13.13,18.12
S$145  (5 unrouted)
  Top 0: 18.39,9.23 18.43,10.05
  Route2 0: 17.26,13.9 16.85,14.58
  Route3 0: 18.43,10.05 18.39,10.87
  Route14 0: 12.53,18.57 12.36,18.51
  Route15 0: 18.39,9.23 18.43,10.05
  Bottom 0: 13.13,18.12 13.09,18.32
S$146  (4 unrouted)
  Route2 0: 16.85,14.58 16.37,15.23
  Route3 0: 18.39,10.87 18.27,11.68
  Route14 0: 12.36,18.51 12.24,18.38
  Route15 0: 18.43,10.05 18.39,10.87
  Bottom 0: 13.09,18.32 12.98,18.48
S$147  (4 unrouted)
  Route2 0: 16.37,15.23 15.84,15.82
  Route3 0: 18.27,11.68 18.07,12.48
  Route14 0: 12.24,18.38 12.17,18.21
  Route15 0: 18.39,10.87 18.27,11.68
  Bottom 0: 12.98,18.48 12.81,18.59
S$148  (5 unrouted)
  Top 0: 18.27,11.68 18.07,12.48
  Route2 0: 15.84,15.82 15.24,16.36
  Route3 0: 18.07,12.48 17.79,13.25
  Route14 0: 12.17,18.21 12.17,18.06
  Route15 0: 18.27,11.68 18.07,12.48
  Bottom 0: 12.81,18.59 12.62,18.63
S$149  (5 unrouted)
  Top 0: 18.07,12.48 17.79,13.25
  Route2 0: 15.24,16.36 14.6,16.84
  Route3 0: 17.79,13.25 17.44,13.99
  Route14 0: 12.17,18.06 12.08,17.95
  Route15 0: 18.07,12.48 17.79,13.25
  Bottom 0: 12.62,18.63 12.06,18.63
S$150  (5 unrouted)
  Top 0: 17.79,13.25 17.44,13.99
  Route2 0: 14.6,16.84 13.91,17.25
  Route3 0: 17.44,13.99 17.02,14.7
  Route14 0: 12.08,17.95 11.66,18.05
  Route15 0: 17.79,13.25 17.44,13.99
  Bottom 0: 12.06,18.63 12.06,18.64
S$151  (5 unrouted)
  Top 0: 17.44,13.99 17.02,14.7
  Route2 0: 13.91,17.25 13.19,17.59
  Route3 0: 17.02,14.7 16.53,15.35
  Route14 0: 11.66,18.05 10.87,18.17
  Route15 0: 17.44,13.99 17.02,14.7
  Bottom 0: 12.06,18.64 12.06,21.48
S$152  (4 unrouted)
  Route2 0: 13.19,17.59 12.98,17.67
  Route3 0: 16.53,15.35 15.98,15.96
  Route14 0: 10.87,18.17 10.5,18.19
  Route15 0: 17.02,14.7 16.53,15.35
  Bottom 0: 8.59,18.12 8.57,18.13
S$153  (4 unrouted)
  Route2 0: 12.98,17.67 12.94,17.81
  Route3 0: 15.98,15.96 15.37,16.51
  Route14 0: 10.5,18.19 10.46,18.31
  Route15 0: 16.53,15.35 15.98,15.96
  Bottom 0: 8.57,18.13 8.55,18.14
S$154  (4 unrouted)
  Route2 0: 12.94,17.81 13,17.87
  Route3 0: 15.37,16.51 14.71,17
  Route14 0: 10.46,18.31
  Route15 0: 15.98,15.96 15.37,16.51
  Bottom 0: 8.55,18.14 8.53,18.14
S$155  (5 unrouted)
  Top 0: 15.37,16.51 14.71,17
  Route2 0: 13,17.87 13.07,18.03
  Route3 0: 14.71,17 14.01,17.42
  Route14 0: 10.46,18.31 10.53,18.48
  Route15 0: 15.37,16.51 14.71,17
  Bottom 0: 8.53,18.14 8.5,18.14
S$156  (5 unrouted)
  Top 0: 14.71,17 14.01,17.42
  Route2 0: 13.07,18.03 13.07,18.21
  Route3 0: 14.01,17.42 13.27,17.77
  Route14 0: 10.53,18.48 10.53,18.66
  Route15 0: 14.71,17 14.01,17.42
  Bottom 0: 8.5,18.14 8.47,18.13
S$157  (4 unrouted)
  Route2 0: 13.07,18.21 13,18.38
  Route3 0: 13.27,17.77 13.09,17.84
  Route14 0: 10.53,18.66 10.46,18.82
  Route15 0: 14.01,17.42 13.27,17.77
  Bottom 0: 8.47,18.13 8.43,18.11
S$158  (4 unrouted)
  Route2 0: 13,18.38 12.87,18.51
  Route3 0: 13.09,17.84 13.04,17.95
  Route14 0: 10.46,18.82 10.42,18.87
  Route15 0: 13.27,17.77 13.09,17.84
  Bottom 0: 8.43,18.11 8.39,18.09
S$159  (4 unrouted)
  Route2 0: 12.87,18.51 12.71,18.57
  Route3 0: 13.04,17.95 13.07,18.03
  Route14 0: 10.42,18.87 10.46,18.91
  Route15 0: 13.09,17.84 13.04,17.95
  Bottom 0: 8.39,18.09 8.34,18.07
S$160  (4 unrouted)
  Route2 0: 12.71,18.57 12.53,18.57
  Route3 0: 13.07,18.03 13.07,18.21
  Route14 0: 10.46,18.91 10.53,19.08
  Route15 0: 13.04,17.95 13.07,18.03
  Bottom 0: 8.34,18.07 8.24,18.01
S$161  (4 unrouted)
  Route2 0: 12.53,18.57 12.36,18.51
  Route3 0: 13.07,18.21 13,18.38
  Route14 0: 10.53,19.08 10.53,19.26
  Route15 0: 13.07,18.03 13.07,18.21
  Bottom 0: 8.24,18.01 8.13,18.18
S$162  (4 unrouted)
  Route2 0: 12.36,18.51 12.24,18.38
  Route3 0: 13,18.38 12.87,18.51
  Route14 0: 10.53,19.26 10.46,19.42
  Route15 0: 13.07,18.21 13,18.38
  Bottom 0: 8.13,18.18 8.18,18.21
S$163  (4 unrouted)
  Route2 0: 12.24,18.38 12.17,18.21
  Route3 0: 12.87,18.51 12.71,18.57
  Route14 0: 10.46,19.42 10.42,19.47
  Route15 0: 13,18.38 12.87,18.51
  Bottom 0: 8.18,18.21 8.25,18.27
S$164  (5 unrouted)
  Top 0: 12.62,18.63 12.42,18.59
  Route2 0: 12.17,18.21 12.17,18.06
  Route3 0: 12.71,18.57 12.53,18.57
  Route14 0: 10.42,19.47 10.46,19.51
  Route15 0: 12.87,18.51 12.71,18.57
  Bottom 0: 8.25,18.27 8.28,18.29
S$165  (4 unrouted)
  Route2 0: 12.17,18.06 12.08,17.95
  Route3 0: 12.53,18.57 12.36,18.51
  Route14 0: 10.46,19.51 10.53,19.68
  Route15 0: 12.71,18.57 12.53,18.57
  Bottom 0: 8.28,18.29 8.3,18.31
S$166  (4 unrouted)
  Route2 0: 12.08,17.95 11.66,18.05
  Route3 0: 12.36,18.51 12.24,18.38
  Route14 0: 10.53,19.68 10.53,19.86
  Route15 0: 12.53,18.57 12.36,18.51
  Bottom 0: 8.3,18.31 8.31,18.34
S$167  (4 unrouted)
  Route2 0: 11.66,18.05 10.87,18.17
  Route3 0: 12.24,18.38 12.17,18.21
  Route14 0: 10.53,19.86 10.46,20.02
  Route15 0: 12.36,18.51 12.24,18.38
  Bottom 0: 8.31,18.34 8.32,18.36
S$168  (4 unrouted)
  Route2 0: 10.87,18.17 10.58,18.19
  Route3 0: 12.17,18.21 12.09,18.15
  Route14 0: 10.46,20.02 10.42,20.07
  Route15 0: 12.24,18.38 12.17,18.21
  Bottom 0: 8.32,18.36 8.32,18.37
S$169  (5 unrouted)
  Top 0: 12.11,17.84 12.01,17.76
  Route2 0: 10.58,18.19 10.52,18.32
  Route3 0: 12.09,18.15 11.7,18.25
  Route14 0: 10.42,20.07 10.46,20.11
  Route15 0: 12.17,18.21 12.09,18.15
  Bottom 0: 8.32,18.37 8.32,18.39
S$170  (5 unrouted)
  Top 0: 12.01,17.76 11.84,17.81
  Route2 0: 10.52,18.32 10.54,18.35
  Route3 0: 11.7,18.25 10.89,18.37
  Route14 0: 10.46,20.11 10.53,20.28
  Route15 0: 12.09,18.15 11.7,18.25
  Bottom 0: 8.32,18.39 8.31,18.41
S$171  (5 unrouted)
  Top 0: 11.84,17.81 10.96,17.96
  Route2 0: 10.54,18.35 10.59,18.55
  Route3 0: 10.89,18.37 10.79,18.38
  Route14 0: 10.53,20.28 10.53,20.46
  Route15 0: 11.7,18.25 11.27,18.31
  Bottom 0: 8.31,18.41 8.59,18.12
S$172  (5 unrouted)
  Top 0: 10.96,17.96 10.51,17.99
  Route2 0: 10.59,18.55 10.56,18.74
  Route3 0: 10.79,18.38 10.52,18.83
  Route14 0: 10.53,20.46 10.46,20.62
  Route15 0: 11.27,18.31 11.21,18.38
  Bottom 0: 12.44,17.95 12.43,17.96
S$173  (5 unrouted)
  Top 0: 10.51,17.99 10.38,18
  Route2 0: 10.56,18.74 10.46,18.91
  Route3 0: 10.52,18.83 10.45,18.9
  Route14 0: 10.46,20.62 10.45,20.63
  Route15 0: 11.21,18.38 11.21,20.71
  Bottom 0: 12.43,17.96 12.41,17.98
S$174  (5 unrouted)
  Top 0: 10.38,18 10.36,18
  Route2 0: 10.46,18.91
  Route3 0: 10.45,18.9 10.46,18.91
  Route14 0: 10.45,20.63 10.55,20.77
  Route15 0: 11.21,20.71 11.17,20.9
  Bottom 0: 12.41,17.98 12.39,17.99
S$175  (5 unrouted)
  Top 0: 10.36,18 10.35,18
  Route2 0: 10.46,18.91 10.53,19.08
  Route3 0: 10.46,18.91 10.53,19.08
  Route14 0: 10.55,20.77 10.59,20.97
  Route15 0: 11.17,20.9 11.06,21.07
  Bottom 0: 12.39,17.99 12.37,18
S$176  (5 unrouted)
  Top 0: 10.35,18 10.23,18
  Route2 0: 10.53,19.08 10.53,19.26
  Route3 0: 10.53,19.08 10.53,19.26
  Route14 0: 10.59,20.97 10.55,21.16
  Route15 0: 11.06,21.07 10.8,21.33
  Bottom 0: 12.37,18 12.35,18
S$177  (5 unrouted)
  Top 0: 10.23,18 10.2,18.13
  Route2 0: 10.53,19.26 10.46,19.42
  Route3 0: 10.53,19.26 10.46,19.42
  Route14 0: 10.55,21.16 10.44,21.33
  Route15 0: 10.8,21.33 10.63,21.44
  Bottom 0: 12.35,18 12.33,18.01
S$178  (5 unrouted)
  Top 0: 10.2,18.13 10.33,18.19
  Route2 0: 10.46,19.42 10.42,19.47
  Route3 0: 10.46,19.42 10.42,19.47
  Route14 0: 10.44,21.33 10.27,21.44
  Route15 0: 10.63,21.44 10.44,21.48
  Bottom 0: 12.33,18.01 12.31,18.02
S$179  (5 unrouted)
  Top 0: 10.33,18.19 10.46,18.31
  Route2 0: 10.42,19.47 10.46,19.51
  Route3 0: 10.42,19.47 10.46,19.51
  Route14 0: 10.27,21.44 10.08,21.48
  Route15 0: 10.3,21.09 10.31,21.08
  Bottom 0: 12.31,18.02 12.29,18.02
S$180  (5 unrouted)
  Top 0: 10.46,18.31 10.53,18.48
  Route2 0: 10.46,19.51 10.53,19.68
  Route3 0: 10.46,19.51 10.53,19.68
  Route14 0: 9.9,20.79 9.89,20.81
  Route15 0: 10.31,21.08
  Bottom 0: 12.29,18.02 12.27,18.02
S$181  (5 unrouted)
  Top 0: 10.53,18.48 10.53,18.66
  Route2 0: 10.53,19.68 10.53,19.86
  Route3 0: 10.53,19.68 10.53,19.86
  Route14 0: 9.89,20.81 9.87,20.82
  Route15 0: 10.31,21.08 10.33,21.08
  Bottom 0: 12.27,18.02 12.24,18.02
S$182  (5 unrouted)
  Top 0: 10.53,18.66 10.46,18.82
  Route2 0: 10.53,19.86 10.46,20.02
  Route3 0: 10.53,19.86 10.46,20.02
  Route14 0: 9.87,20.82 9.85,20.83
  Route15 0: 10.33,21.08 10.34,21.07
  Bottom 0: 12.24,18.02 12.24,18.22
S$183  (5 unrouted)
  Top 0: 10.46,18.82 10.42,18.87
  Route2 0: 10.46,20.02 10.42,20.07
  Route3 0: 10.46,20.02 10.42,20.07
  Route14 0: 9.85,20.83 9.83,20.84
  Route15 0: 10.34,21.07 10.35,21.07
  Bottom 0: 12.24,18.22 12.27,18.22
S$184  (5 unrouted)
  Top 0: 10.42,18.87 10.46,18.91
  Route2 0: 10.42,20.07 10.46,20.11
  Route3 0: 10.42,20.07 10.46,20.11
  Route14 0: 9.83,20.84 9.81,20.85
  Route15 0: 10.35,21.07 10.39,21.07
  Bottom 0: 12.27,18.22 12.29,18.23
S$185  (5 unrouted)
  Top 0: 10.46,18.91 10.53,19.08
  Route2 0: 10.46,20.11 10.53,20.28
  Route3 0: 10.46,20.11 10.53,20.28
  Route14 0: 9.81,20.85 9.79,20.85
  Route15 0: 10.39,21.07 10.44,21.07
  Bottom 0: 12.29,18.23 12.31,18.23
S$186  (5 unrouted)
  Top 0: 10.53,19.08 10.53,19.26
  Route2 0: 10.53,20.28 10.53,20.46
  Route3 0: 10.53,20.28 10.53,20.46
  Route14 0: 9.79,20.85 9.77,20.86
  Route15 0: 10.44,21.07 10.44,20.87
  Bottom 0: 12.31,18.23 12.33,18.24
S$187  (5 unrouted)
  Top 0: 10.53,19.26 10.46,19.42
  Route2 0: 10.53,20.46 10.46,20.62
  Route3 0: 10.53,20.46 10.46,20.62
  Route14 0: 9.77,20.86 9.75,20.86
  Route15 0: 10.44,20.87 10.41,20.87
  Bottom 0: 12.33,18.24 12.35,18.24
S$188  (5 unrouted)
  Top 0: 10.46,19.42 10.42,19.47
  Route2 0: 10.46,20.62 10.42,20.67
  Route3 0: 10.46,20.62 10.42,20.67
  Route14 0: 9.75,20.86 9.73,20.87
  Route15 0: 10.41,20.87 10.35,20.86
  Bottom 0: 12.35,18.24 12.37,18.25
S$189  (5 unrouted)
  Top 0: 10.42,19.47 10.46,19.51
  Route2 0: 10.42,20.67 10.46,20.71
  Route3 0: 10.42,20.67 10.46,20.71
  Route14 0: 9.73,20.87 9.7,20.87
  Route15 0: 10.35,20.86 10.34,20.86
  Bottom 0: 12.37,18.25 12.39,18.26
S$190  (5 unrouted)
  Top 0: 10.46,19.51 10.53,19.68
  Route2 0: 10.46,20.71 10.53,20.88
  Route3 0: 10.46,20.71 10.53,20.88
  Route14 0: 9.7,20.87 9.7,21.07
  Route15 0: 10.34,20.86 10.33,20.86
  Bottom 0: 12.39,18.26 12.41,18.27
S$191  (5 unrouted)
  Top 0: 10.53,19.68 10.53,19.86
  Route2 0: 10.53,20.88 10.53,21.06
  Route3 0: 10.53,20.88 10.53,21.06
  Route14 0: 9.7,21.07 9.73,21.07
  Route15 0: 10.33,20.86 10.31,20.85
  Bottom 0: 12.41,18.27 12.43,18.28
S$192  (5 unrouted)
  Top 0: 10.53,19.86 10.46,20.02
  Route2 0: 10.53,21.06 10.46,21.22
  Route3 0: 10.53,21.06 10.46,21.22
  Route14 0: 9.73,21.07 9.75,21.07
  Route15 0: 10.31,20.85
  Bottom 0: 12.43,18.28 12.44,18.3
S$193  (5 unrouted)
  Top 0: 10.46,20.02 10.42,20.07
  Route2 0: 10.46,21.22 10.33,21.35
  Route3 0: 10.46,21.22 10.33,21.35
  Route14 0: 9.75,21.07 9.77,21.07
  Route15 0: 10.31,20.85 10.3,20.85
  Bottom 0: 12.44,18.3 12.44,17.95
S$194  (5 unrouted)
  Top 0: 10.42,20.07 10.46,20.11
  Route2 0: 10.33,21.35 10.17,21.42
  Route3 0: 10.33,21.35 10.17,21.42
  Route14 0: 9.77,21.07 9.79,21.08
  Route15 0: 10.3,20.85 10.3,20.84
  Bottom 0: 10.84,9.59 10.83,9.57
S$195  (5 unrouted)
  Top 0: 10.46,20.11 10.53,20.28
  Route2 0: 10.07,18.32 10.05,18.32
  Route3 0: 10.32,18.48 10.32,18.46
  Route14 0: 9.79,21.08 9.81,21.09
  Route15 0: 10.3,20.84 10.3,21.09
  Bottom 0: 10.83,9.57 10.82,9.55
S$196  (5 unrouted)
  Top 0: 10.53,20.28 10.53,20.46
  Route2 0: 10.05,18.32 10.03,18.32
  Route3 0: 10.32,18.46 10.31,18.44
  Route14 0: 9.81,21.09 9.83,21.09
  Route15 0: 10.3,21.09
  Bottom 0: 10.82,9.55 10.81,9.53
S$197  (5 unrouted)
  Top 0: 10.53,20.46 10.46,20.62
  Route2 0: 10.03,18.32 10.01,18.31
  Route3 0: 10.31,18.44 10.32,18.42
  Route14 0: 9.83,21.09 9.85,21.1
  Route15 0: 10.84,9.97 10.86,9.96
  Bottom 0: 10.81,9.53 10.8,9.51
S$198  (4 unrouted)
  Route2 0: 10.01,18.31 9.99,18.31
  Route3 0: 10.32,18.42 10.32,18.4
  Route14 0: 9.85,21.1 9.87,21.12
  Route15 0: 10.86,9.96 10.88,9.95
  Bottom 0: 10.8,9.51 10.79,9.49
S$199  (5 unrouted)
  Top 0: 10.42,20.67 10.46,20.71
  Route2 0: 9.99,18.31 9.97,18.3
  Route3 0: 10.32,18.4 10.32,18.38
  Route14 0: 9.87,21.12 9.89,21.13
  Route15 0: 10.88,9.95 10.9,9.95
  Bottom 0: 10.79,9.49 10.79,9.47
S$200  (5 unrouted)
  Top 0: 10.46,20.71 10.53,20.88
  Route2 0: 9.97,18.3 9.95,18.29
  Route3 0: 10.32,18.38 10.33,18.36
  Route14 0: 9.89,21.13 9.9,21.14
  Route15 0: 10.9,9.95 10.92,9.95
  Bottom 0: 10.79,9.47 10.78,9.45
S$201  (5 unrouted)
  Top 0: 10.53,20.88 10.53,21.06
  Route2 0: 9.95,18.29 9.93,18.28
  Route3 0: 10.33,18.36 10.34,18.34
  Route14 0: 9.9,21.14 9.9,20.79
  Route15 0: 10.92,9.95 10.94,9.95
  Bottom 0: 10.78,9.45 10.78,9.43
S$202  (4 unrouted)
  Top 0: 10.53,21.06 10.46,21.22
  Route2 0: 9.93,18.28 9.91,18.27
  Route3 0: 10.34,18.34 10.35,18.32
  Route15 0: 10.94,9.95 10.96,9.95
  Bottom 0: 10.78,9.43 10.78,9.4
S$203  (4 unrouted)
  Route2 0: 9.91,18.27 9.89,18.25
  Route3 0: 10.35,18.32 10.36,18.29
  Route14 0.2: 11.32,10.08 11.32,10.1
  Route15 0: 10.96,9.95 10.98,9.96
  Bottom 0: 10.78,9.4 10.58,9.4
S$204  (5 unrouted)
  Top 0: 10.33,21.35 10.17,21.42
  Route2 0: 9.89,18.25 9.87,18.24
  Route3 0: 10.36,18.29 10.19,18.19
  Route14 0.2: 11.32,10.1 11.31,10.12
  Route15 0: 10.98,9.96 11,9.97
  Bottom 0: 10.58,9.4 10.58,9.43
S$205  (5 unrouted)
  Top 0: 12.78,17.93 12.77,17.91
  Route2 0: 9.87,18.24 9.73,18.38
  Route3 0: 10.19,18.19 10.18,18.21
  Route14 0.2: 11.31,10.12 11.31,10.14
  Route15 0: 11,9.97 11.02,9.98
  Bottom 0: 10.58,9.43 10.58,9.45
S$206  (5 unrouted)
  Top 0: 12.77,17.91 12.76,17.9
  Route2 0: 9.73,18.38 9.75,18.4
  Route3 0: 10.18,18.21 10.16,18.23
  Route14 0.2: 11.31,10.14 11.3,10.16
  Route15 0: 11.02,9.98 11.06,9.77
  Bottom 0: 10.58,9.45 10.57,9.47
S$207  (5 unrouted)
  Top 0: 12.76,17.9 12.75,17.88
  Route2 0: 9.75,18.4 9.77,18.42
  Route3 0: 10.16,18.23 10.15,18.25
  Route14 0.2: 11.3,10.16 11.3,10.18
  Route15 0: 11.06,9.77 11.04,9.76
  Bottom 0: 10.57,9.47 10.57,9.49
S$208  (5 unrouted)
  Top 0: 12.75,17.88 12.74,17.86
  Route2 0: 9.77,18.42 9.78,18.44
  Route3 0: 10.15,18.25 10.13,18.26
  Route14 0.2: 11.3,10.18 11.29,10.2
  Route15 0: 11.04,9.76 10.97,9.72
  Bottom 0: 10.57,9.49 10.56,9.51
S$209  (5 unrouted)
  Top 0: 12.74,17.86 12.73,17.84
  Route2 0: 9.78,18.44 9.79,18.45
  Route3 0: 10.13,18.26 10.12,18.28
  Route14 0.2: 11.29,10.2 11.28,10.22
  Route15 0: 10.97,9.72 10.95,9.71
  Bottom 0: 10.56,9.51 10.55,9.53
S$210  (5 unrouted)
  Top 0: 12.73,17.84 12.73,17.82
  Route2 0: 9.79,18.45 9.8,18.47
  Route3 0: 10.12,18.28 10.1,18.29
  Route14 0.2: 11.28,10.22 11.27,10.24
  Route15 0: 10.95,9.71 10.92,9.68
  Bottom 0: 10.55,9.53 10.54,9.55
S$211  (5 unrouted)
  Top 0: 12.73,17.82 12.72,17.79
  Route2 0: 9.8,18.47 9.81,18.49
  Route3 0: 10.1,18.29 10.08,18.3
  Route14 0.2: 11.27,10.24 11.26,10.25
  Route15 0: 10.92,9.68 10.91,9.67
  Bottom 0: 10.54,9.55 10.53,9.57
S$212  (5 unrouted)
  Top 0: 12.72,17.79 12.72,17.77
  Route2 0: 9.81,18.49 9.82,18.51
  Route3 0: 10.08,18.3 10.06,18.31
  Route14 0.2: 11.26,10.25 11.25,10.27
  Route15 0: 10.91,9.67 10.9,9.65
  Bottom 0: 10.53,9.57 10.52,9.59
S$213  (5 unrouted)
  Top 0: 12.72,17.77 12.72,17.74
  Route2 0: 9.82,18.51 9.83,18.53
  Route3 0: 10.06,18.31 10.04,18.32
  Route14 0.2: 11.25,10.27 11.23,10.29
  Route15 0: 10.9,9.65 10.89,9.64
  Bottom 0: 10.52,9.59 10.5,9.6
S$214  (5 unrouted)
  Top 0: 12.72,17.74 12.52,17.74
  Route2 0: 9.83,18.53 9.83,18.55
  Route3 0: 10.04,18.32 10.02,18.32
  Route14 0.2: 11.23,10.29 11.22,10.3
  Route15 0: 10.89,9.64 10.83,9.98
  Bottom 0: 10.5,9.6 10.85,9.6
S$215  (5 unrouted)
  Top 0: 12.52,17.74 12.52,17.77
  Route2 0: 9.83,18.55 9.83,18.57
  Route3 0: 10.02,18.32 10.32,18.51
  Route14 0.2: 11.22,10.3 11.2,10.32
  Route15 0: 10.83,9.98 10.84,9.97
  Bottom 0: 10.85,9.6 10.84,9.59
S$216  (3 unrouted)
  Top 0: 12.52,17.77 12.52,17.79
  Route2 0: 9.83,18.57 10.07,18.32
  Route3 0: 10.32,18.51 10.32,18.48
  Route14 0.2: 11.2,10.32 11.18,10.33
S$217  (5 unrouted)
  Top 0: 12.52,17.79 12.51,17.82
  Route2 0: 9.32,10.62 9.32,10.61
  Route3 0: 9.36,9.56 9.34,9.57
  Route14 0.2: 11.18,10.33 11.16,10.34
  Route15 0.2: 10.68,9.78 10.73,9.78
  Bottom 0.2: 10.12,8.8 10.16,8.8
S$218  (5 unrouted)
  Top 0: 12.51,17.82 12.51,17.84
  Route2 0: 9.32,10.61
  Route3 0: 9.34,9.57 9.31,9.58
  Route14 0.2: 11.16,10.34 11.15,10.35
  Route15 0.2: 10.73,9.78 10.78,9.79
  Bottom 0.2: 10.16,8.8 10.2,8.81
S$219  (5 unrouted)
  Top 0: 12.51,17.84 12.5,17.86
  Route2 0: 9.32,10.61 9.33,10.61
  Route3 0: 9.31,9.58 9.3,9.59
  Route14 0.2: 11.15,10.35 11.13,10.36
  Route15 0.2: 10.78,9.79 10.83,9.8
  Bottom 0.2: 10.2,8.81 10.23,8.81
S$220  (5 unrouted)
  Top 0: 12.5,17.86 12.49,17.88
  Route2 0: 9.33,10.61 9.34,10.61
  Route3 0: 9.3,9.59 9.29,9.59
  Route14 0.2: 11.13,10.36 11.11,10.36
  Route15 0.2: 10.83,9.8 10.88,9.81
  Bottom 0.2: 10.23,8.81 10.27,8.82
S$221  (5 unrouted)
  Top 0: 12.49,17.88 12.48,17.9
  Route2 0: 9.34,10.61 9.35,10.61
  Route3 0: 9.29,9.59 9.28,9.59
  Route14 0.2: 11.11,10.36 11.09,10.37
  Route15 0.2: 10.88,9.81 10.93,9.82
  Bottom 0.2: 10.27,8.82 10.31,8.84
S$222  (5 unrouted)
  Top 0: 12.48,17.9 12.47,17.91
  Route2 0: 9.35,10.61 9.36,10.61
  Route3 0: 9.28,9.59 9.27,9.59
  Route14 0.2: 11.09,10.37 11.07,10.38
  Route15 0.2: 10.93,9.82 10.98,9.84
  Bottom 0.2: 10.31,8.84 10.35,8.85
S$223  (5 unrouted)
  Top 0: 12.47,17.91 12.46,17.93
  Route2 0: 9.36,10.61 9.37,10.61
  Route3 0: 9.27,9.59 9.26,9.59
  Route14 0.2: 11.07,10.38 11.04,10.38
  Route15 0.2: 10.98,9.84 11.02,9.87
  Bottom 0.2: 10.35,8.85 10.38,8.87
S$224  (5 unrouted)
  Top 0: 12.46,17.93 12.44,17.95
  Route2 0: 9.37,10.61 9.39,10.61
  Route3 0: 9.26,9.59 9.25,9.59
  Route14 0.2: 11.04,10.38 11.02,10.38
  Route15 0.2: 11.02,9.87 11.07,9.89
  Bottom 0.2: 10.38,8.87 10.42,8.89
S$225  (5 unrouted)
  Top 0: 12.44,17.95 12.79,17.95
  Route2 0: 9.39,10.61 9.4,10.62
  Route3 0: 9.25,9.59
  Route14 0.2: 11.02,10.38 11.01,10.38
  Route15 0.2: 11.07,9.89 11.11,9.92
  Bottom 0.2: 10.42,8.89 10.45,8.91
S$226  (4 unrouted)
  Top 0: 12.79,17.95 12.78,17.93
  Route2 0: 9.4,10.62 9.23,10.34
  Route3 0: 9.25,9.59 9.19,9.79
  Route15 0.2: 11.11,9.92 11.15,9.95
  Bottom 0.2: 10.45,8.91 10.48,8.93
S$227  (5 unrouted)
  Top 0: 9.3,10.2 9.29,10.22
  Route2 0: 9.23,10.34 9.23,10.35
  Route3 0: 9.19,9.79 9.2,9.8
  Route14 0.2: 10.13,8.4 10.25,8.41
  Route15 0.2: 11.15,9.95 11.19,9.98
  Bottom 0.2: 10.48,8.93 10.51,8.96
S$228  (5 unrouted)
  Top 0: 9.29,10.22 9.27,10.23
  Route2 0: 9.23,10.35 9.23,10.36
  Route3 0: 9.2,9.8
  Route14 0.2: 10.25,8.41 10.36,8.43
  Route15 0.2: 11.19,9.98 11.22,10.02
  Bottom 0.2: 10.51,8.96 10.54,8.99
S$229  (5 unrouted)
  Top 0: 9.27,10.23 9.25,10.24
  Route2 0: 9.23,10.36
  Route3 0: 9.2,9.8 9.21,9.81
  Route14 0.2: 10.36,8.43 10.47,8.45
  Route15 0.2: 11.22,10.02 11.25,10.06
  Bottom 0.2: 10.54,8.99 10.56,9.02
S$230  (5 unrouted)
  Top 0: 9.25,10.24 9.23,10.25